# Altium PCB Layout.PcbDoc
Units mm, origin at the board's own origin, x right, y up, seen from the top; angles counter-clockwise.
Board outline 29.5 x 30 mm, 2 copper layers (Top Layer, Bottom Layer), stack 1.135 mm thick; 16 components, 13 nets, 63 pads, 8 vias.
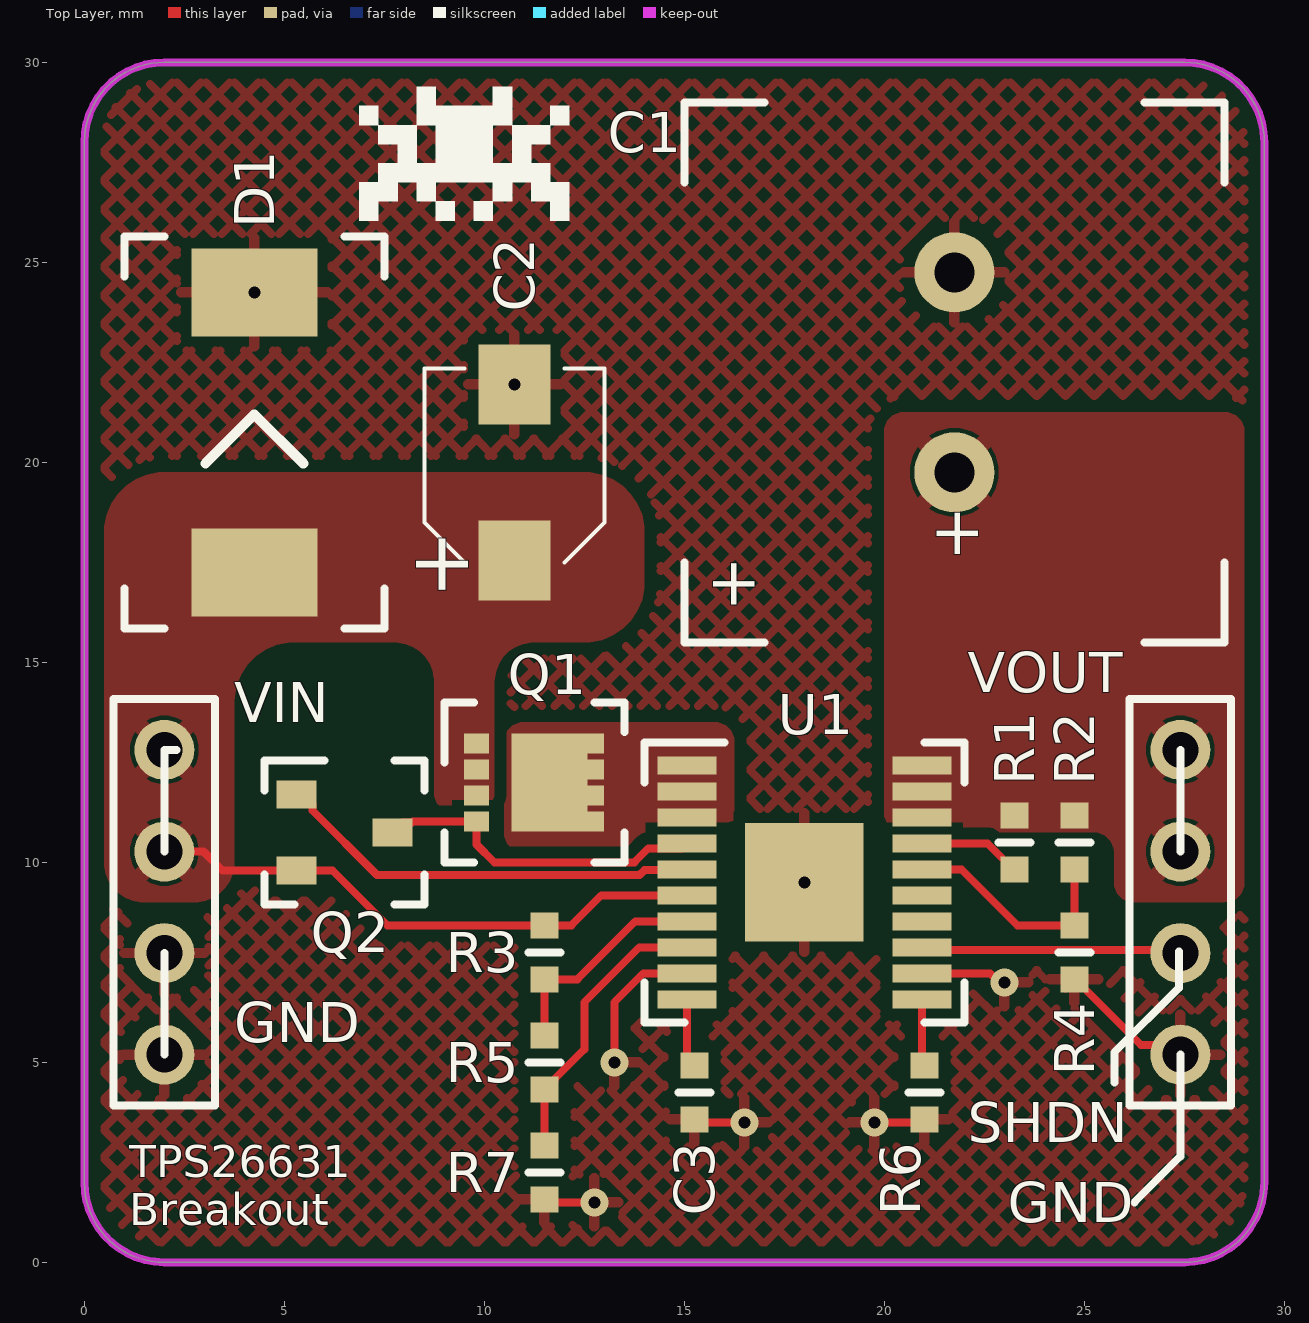
[diagram p0: Top Layer view]
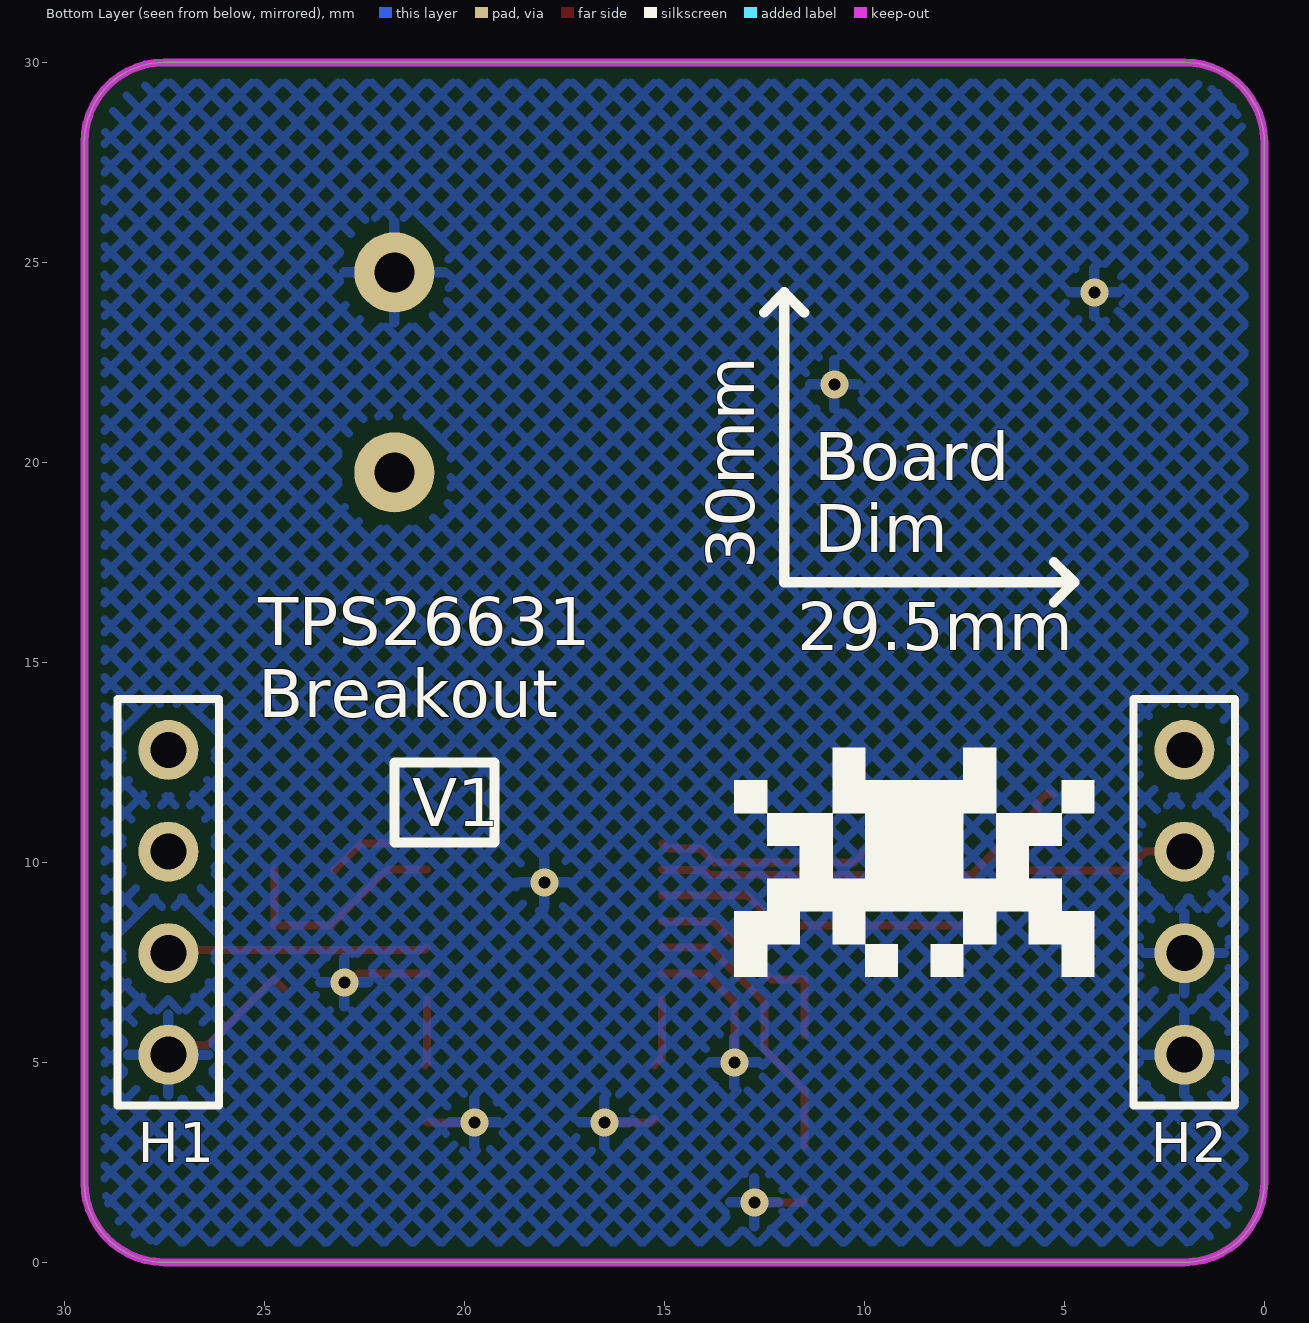
[diagram p1: Bottom Layer view, seen from below]
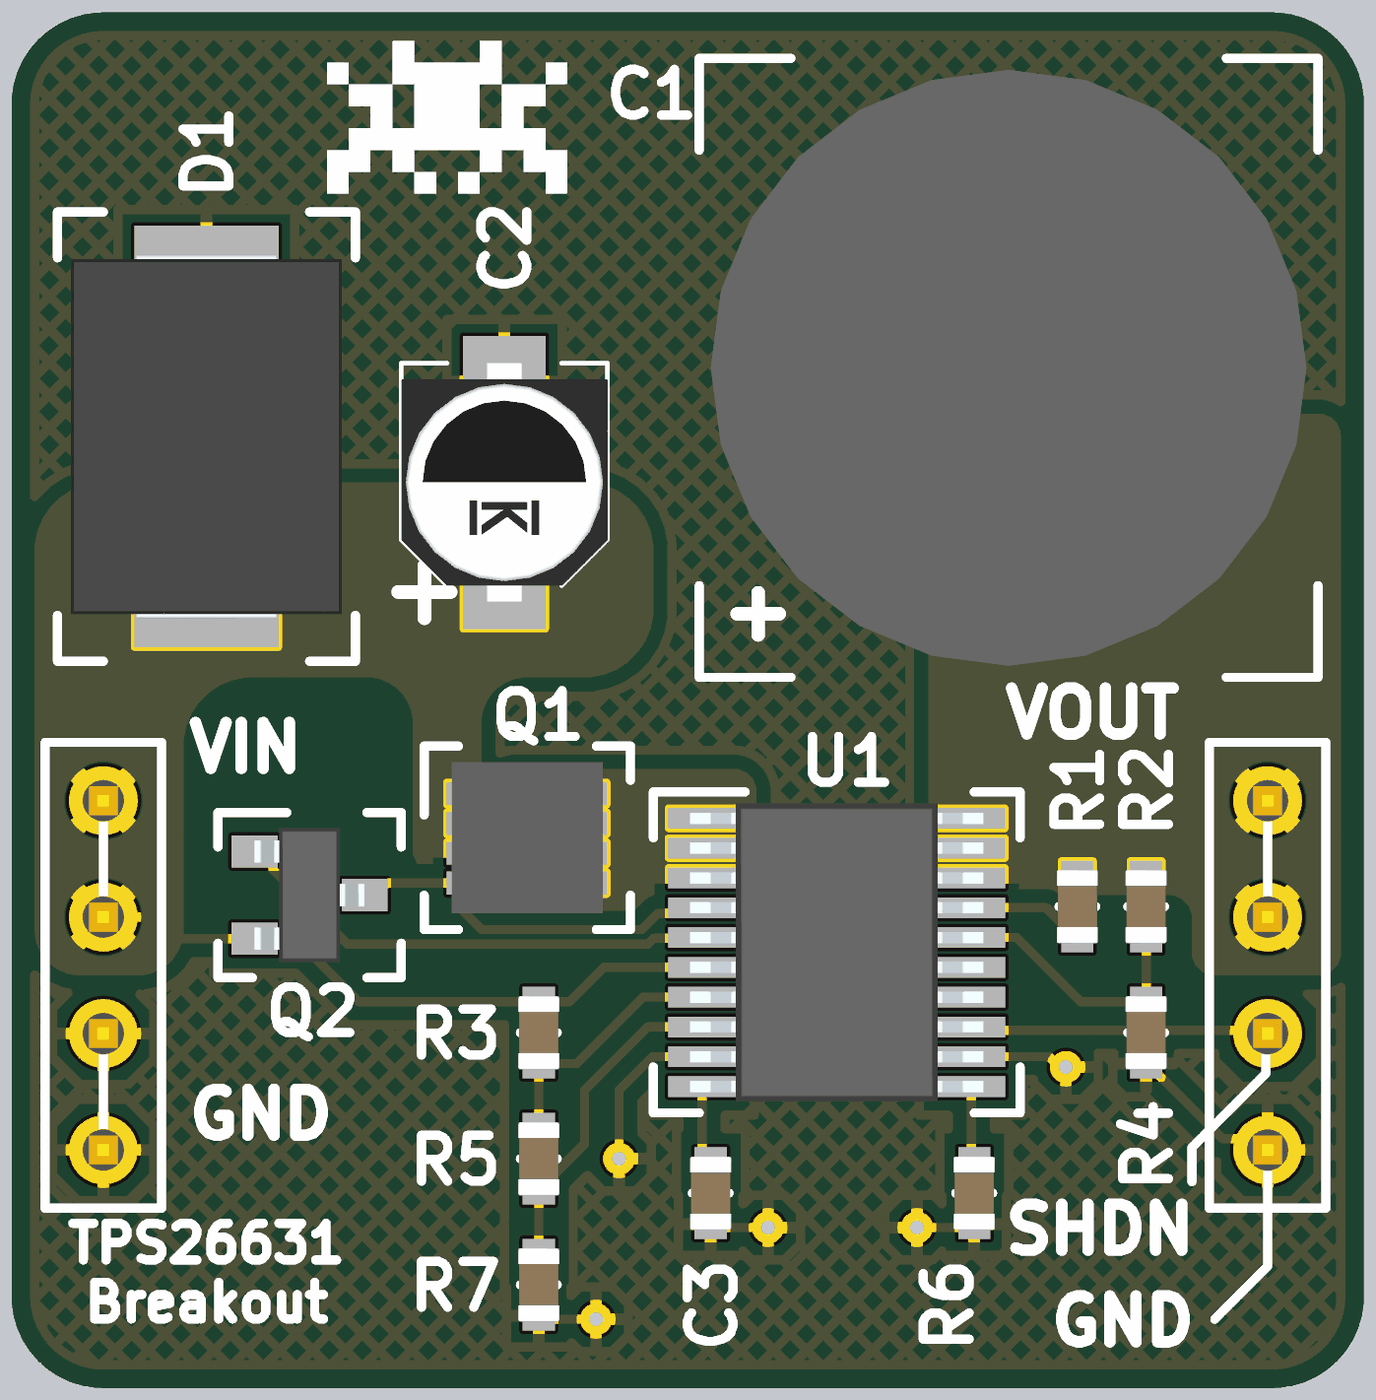
[diagram p2: 3D render of the assembled board from above, using the file's embedded part models]

## Layer stack, top to bottom
Top Solder: solder mask 0.0102, Solder Resist, Dk 3.8
Top Layer: signal copper 0.035
Dielectric 1: prepreg 1.065, FR-4, Dk 4.8
Bottom Layer: signal copper 0.035
Bottom Solder: solder mask 0.0102, Solder Resist, Dk 3.8

## Board outline
2,0 cw(c2,2) 0,2 0,28 cw(c2,28) 2,30 27.5,30 cw(c27.5,28) 29.5,28 29.5,2 cw(c27.5,2) 27.5,0

## Design rules (kind name [scope] priority, off if disabled: settings)
BoardOutlineClearance [All] p1: gap=0.2 ignorepadtopadclearanceinfootprint=FALSE
Clearance "inPolygon Clearance" [InPolygon] p1: gap=0.3 ignorepadtopadclearanceinfootprint=TRUE // this rule ensures that every net within a polygon of a different net has a set clearance from the poly
Clearance "High Current Polygon Clearance" [(InPolygon AND InNetClass('High_Current_Nets'))] p2: gap=0 ignorepadtopadclearanceinfootprint=TRUE // this rule ensures that every net within a polygon of a different net has a set clearance from the poly
Clearance "Different Diff Pair" [All] p3: gap=0.2 ignorepadtopadclearanceinfootprint=TRUE
Clearance "Same Diff Pair" [All] p4: gap=0.1 ignorepadtopadclearanceinfootprint=TRUE
Clearance "Different Nets" [not InAnyDifferentialPair] p5: gap=0.3 ignorepadtopadclearanceinfootprint=TRUE except(0.1: Arc-SMDPad Arc-THPad Arc-Via Arc-Text Track-SMDPad Track-THPad Track-Via Track-Text SMDPad-Text THPad-Text Via-Text Fill-Text Poly-Text Region-Text Text-Text; 0.12: Arc-Arc Arc-Track Track-Track; 0.15: SMDPad-SMDPad SMDPad-THPad SMDPad-Via THPad-THPad THPad-Via Via-Via; 0.2: Arc-Hole Track-Hole SMDPad-Hole THPad-Hole Via-Hole Fill-Hole Poly-Hole Region-Hole Text-Hole)
Clearance "Same Net" [not InAnyDifferentialPair] p6: gap=0 ignorepadtopadclearanceinfootprint=TRUE except(0.1: THPad-Via; 0.18: Arc-Arc Arc-Track Track-Track)
ComponentClearance [All] p1: gap=0.102 collisioncheckmode=3 verticalgap=0.102 showdistances=TRUE
DiffPairsRouting "Ethernet Routing" [InDifferentialPairClass('Ethernet_Pairs')] p1: maxlimit=0.2 minlimit=0.2 mostfreqgap=0.2 toplayer_minwidth=0.25 toplayer_maxwidth=0.25 toplayer_prefwidth=0.25 bottomlayer_minwidth=0.25 bottomlayer_maxwidth=0.25 bottomlayer_prefwidth=0.25 impedanceprofiledriven=TRUE maxuncoupledlength=12.7
DiffPairsRouting "USB Routing" [InDifferentialPairClass('USB_Pairs')] p2: maxlimit=0.127 minlimit=0.127 mostfreqgap=0.127 toplayer_minwidth=0.23 toplayer_maxwidth=0.23 toplayer_prefwidth=0.23 bottomlayer_minwidth=0.23 bottomlayer_maxwidth=0.23 bottomlayer_prefwidth=0.23 maxuncoupledlength=12.7
DiffPairsRouting "CAN Routing" [InDifferentialPairClass('CAN_Pairs')] p3: maxlimit=0.5 minlimit=0.5 mostfreqgap=0.5 toplayer_minwidth=0.201 toplayer_maxwidth=0.201 toplayer_prefwidth=0.201 bottomlayer_minwidth=0.201 bottomlayer_maxwidth=0.201 bottomlayer_prefwidth=0.201 impedanceprofiledriven=TRUE maxuncoupledlength=12.7
Height [All] p1: minheight=0 maxheight=1816.048 prefheight=12.7
HoleSize [All] p1: absolutevalues=TRUE maxlimit=6.3 minlimit=0.3 maxpercent=80.000 minpercent=20.000
HoleToHoleClearance [All] p1: gap=0.25 allowstackedmicrovias=FALSE
MatchedLengths "XTAL Nets Matched Delays" [InNetClass('XTAL_Nets')] p1: tolerance=25.4 checknetsindiffpair=FALSE checkdiffpairvsdiffpair=TRUE checkxsignals=TRUE checkothers=TRUE usedelayunits=TRUE delaytolerance=10.000000
MatchedLengths "Diff Pair Matched Delays" [InDifferentialPairClass('Ethernet_Pairs') or InDifferentialPairClass('USB_Pairs') or InDifferentialPairClass('CAN_Pairs')] p2: tolerance=5 checknetsindiffpair=TRUE checkdiffpairvsdiffpair=FALSE checkxsignals=FALSE checkothers=FALSE usedelayunits=TRUE delaytolerance=100.000000 phasematching=TRUE phasedelaytolerance=5.000000 phasedistance=12.7
MinimumAnnularRing [All] p1: minimumring=0.2
MinimumSolderMaskSliver [All] p1: minsoldermaskwidth=0
PlaneClearance "Supply Net Clearance" [InNetClass('Supply_Nets')] p1: clearance=0.5
PlaneClearance "All Nets" [All] p2: clearance=0.3
PolygonConnect "High Current" [InNetClass('High_Current_Nets')] p1: thpad.connectstyle=Relief thpad.reliefconductorwidth=0.4 thpad.reliefentries=4 thpad.polygonreliefangle="90 Angle" thpad.airgapwidth=0.1 thpad.conductorbypadedge=TRUE thpad.mindistance=0.381 thpad.enablemindistance=FALSE smdpad.connectstyle=Direct smdpad.reliefconductorwidth=0.254 smdpad.reliefentries=4 smdpad.polygonreliefangle="90 Angle" smdpad.airgapwidth=0.254 via.connectstyle=Direct via.reliefconductorwidth=0.254 via.reliefentries=4 via.polygonreliefangle="90 Angle" via.airgapwidth=0.254
PolygonConnect "Supply Nets" [InNetClass('Supply_Nets') OR InNetClass('Supply_Net')] p2: connectstyle=Relief reliefconductorwidth=0.3 reliefentries=4 polygonreliefangle="90 Angle" conductorbypadedge=TRUE mindistance=0.381 enablemindistance=FALSE airgapwidth=0.254
PolygonConnect General [All] p3: connectstyle=Relief reliefconductorwidth=0.254 reliefentries=4 polygonreliefangle="90 Angle" airgapwidth=0.254
RoutingVias [All] p1: holewidth=0.2 width=0.35 viastyle="Through Hole" minholewidth=0.15 minwidth=0.3 maxholewidth=6.3 maxwidth=6.55
SilkToSilkClearance [All] p1: silktosilkclearance=0
SilkToSolderMaskClearance [All] p1: minsilkscreentomaskgap=0 clearancetoexposedcopper=TRUE
SolderMaskExpansion [All] p1: expansion=0.075 istentingtop=FALSE
SupplyNets "Schematic Supply Nets_2" [InNet('VOUT')] p1: voltage=0.000
SupplyNets "Schematic Supply Nets_1" [InNet('VIN')] p2: voltage=0.000
SupplyNets "Schematic Supply Nets_3" [InNet('GND')] p3: voltage=0.000
UnRoutedNet [All] p1: checkbadconnections=TRUE
Width "nRF Width" [InNetClass('nRF Signal')] p1: maxlimit=0.379 minlimit=0.379 preferedwidth=0.379 minimp=50.000000 maximp=50.000000 favimp=50.000000 checkconnectedcopper=TRUE
Width [All] p2: maxlimit=100 minlimit=0.1 preferedwidth=0.2
20 further rules are at their usual default settings.

## Classes and differential pairs
net class High_Current_Nets: NetQ1_3 VIN VOUT

## Components (designator, comment, footprint, x,y, rotation, side; value= is the part's Value field where it differs from the comment)
C1 "[Cap] Thru-Hole 1000uF 20% 35V" "[Cap] Thru-Hole Polarized 10mm" 21.75,22.25 r90 top (schematic designator C2)
C2 "[Cap] 4mm 1uF 20% 100V" "[Cap] SMD Polarized, 4mm" 10.75,19.75 r90 top (schematic designator C1)
C3 "[Cap] 0603 0.1uF 10% 50V" "[Cap] SMD 0603" 15.25,4.25 r90 top
D1 "DO-214AB" "[Diode] SMD DO-214AB" 4.25,20.75 r90 top
H1 "1x4 Header" "[Header] 1x4 Male" 27.4,9 r270 bottom (schematic designator H2)
H2 "1x4 Header" "[Header] 1x4 Male" 2,9 r270 bottom (schematic designator H1)
Q1 "CSD19537Q3" 8-VSON-CLIP 11.25,12 r270 top
Q2 "[NMOS] SMD 50V 220mA 3Ohm" SOT-23 6.5,10.75 r0 top
R1 "[24k] SMD 0603 1% 1/10W" "[Res] SMD 0603" 23.25,10.5 r90 top (schematic designator R2)
R2 "[499k] SMD 0603 1% 1/8W" "[Res] SMD 0603" 24.75,10.5 r90 top (schematic designator R1)
R3 "[681k] SMD 0603 1% 1/10W" "[Res] SMD 0603" 11.5,7.75 r90 top (schematic designator R4)
R4 "[56k] SMD 0603 1% 1/10W" "[Res] SMD 0603" 24.75,7.75 r90 top (schematic designator R3)
R5 "[8.25k] SMD 0603 1% 1/10W" "[Res] SMD 0603" 11.5,5 r90 top
R6 "[35.7k] SMD 0603 0.1% 1/10W" "[Res] SMD 0603" 21,4.25 r90 top
R7 "[34k] SMD 0603 1% 1/10W" "[Res] SMD 0603" 11.5,2.25 r90 top
U1 "TPS26631PWPT" "[E-Fuse] 4.5-60V 6A" 18,9.5 r0 top

## Footprints (in the part's own frame and the unit in brackets; to place one, negate y for a bottom-side part, rotate by r counter-clockwise, add the part's x,y. Pads: shape width x height; smd on the part's side, far side on the other; paste and mask are expansions set on the pad)
8-VSON-CLIP [mm]
  rect 0.5x0.63 smd: 1(0.985,-1.445) 2(-0.965,-1.445) 2(-0.315,-1.445) 2(0.335,-1.445)
  rect 0.5x0.41 smd: 3(-0.965,1.535) 3(-0.315,1.535) 3(0.335,1.535) 3(0.985,1.535)
  rect 2.45x1.9 smd: 3(0.01,0.38)
  silkscreen extent -2,-2.25 2,2.25, body extent -1.65,-1.65 1.65,1.65, height 1.1
"[Cap] SMD 0603" [mm]
  rect 0.65x0.7 smd: 1(-0.675,0) 2(0.675,0)
  silkscreen extent 0,-0.4 0,0.4, body extent -0.8,-0.45 0.8,0.45, height 0.8
"[Cap] SMD Polarized, 4mm" [mm]
  rect 2x1.8 smd: 1(-2.2,0) 2(2.2,0)
  silkscreen extent -2.25,-2.25 2.6,2.25, body extent -2.6,-2.25 2.6,2.25, height 5.66
"[Cap] Thru-Hole Polarized 10mm" [mm]
  round 2 hole 1: 1(-2.5,0) 2(2.5,0)
  silkscreen extent -6.75,-6.75 6.75,6.75, body extent -6.5,-6.49 6.5,6.49, height 26.5
"[Diode] SMD DO-214AB" [mm]
  rect 2.2x3.15 smd: 1(-3.5,0) 2(3.5,0)
  silkscreen extent -4.9,-3.25 4.9,3.25, body extent -3.97,-2.95 3.97,2.95, height 2.62
"[E-Fuse] 4.5-60V 6A" [mm] "TPS26631PWPT"
  rect 1.475x0.45 smd: 1(-2.938,2.925) 2(-2.938,2.275) 3(-2.938,1.625) 4(-2.938,0.975) 5(-2.938,0.325) 6(-2.938,-0.325) 7(-2.938,-0.975) 8(-2.938,-1.625) 9(-2.938,-2.275) 10(-2.938,-2.925) 11(2.938,-2.925) 12(2.938,-2.275) 13(2.938,-1.625) 14(2.938,-0.975) 15(2.938,-0.325) 16(2.938,0.325) 17(2.938,0.975) 18(2.938,1.625) 19(2.938,2.275) 20(2.938,2.925)
  rect 2.96x2.96 smd: 21(0,0)
  silkscreen extent -4,-3.5 4,3.5, body extent -3.2,-3.25 3.2,3.25, height 1.2
"[Header] 1x4 Male" [mm] "2.54mm pitch"
  round 1.5 hole 0.9: 1(-3.81,0) 2(-1.27,0) 3(1.27,0) 4(3.81,0)
  silkscreen extent -5.08,-1.27 5.08,1.27, body extent -5.08,-1.27 5.08,1.27, height 9.5
"[Res] SMD 0603" [mm]
  rect 0.65x0.7 smd: 1(-0.675,0) 2(0.675,0)
  silkscreen extent 0,-0.4 0,0.4, body extent -0.8,-0.45 0.8,0.45, height 0.8
SOT-23 [mm]
  rect 1x0.7 smd: 1(-1.2,0.95) 2(-1.2,-0.95) 3(1.2,0)
  silkscreen extent -2,-1.8 2,1.8, body extent -1.2,-1.46 1.2,1.46, height 1.2

## Part data
C1: "35PK1000MEFC10X20", Capacitance=1000uF, Max Voltage=35V, Size Package=Thru-Hole, Supplier Part Number 1=1189-1742-ND, Tolerance=20%, Supplier 1=DigiKey
C2: "865080840001", Capacitance=1uF, Max Voltage=100V, Size Package=4mm, Supplier Part Number 1=732-865080840001CT-ND, Tolerance=20%, Supplier 1=DigiKey
C3: "CL10B104KB8NNNC", Capacitance=100nF, Max Voltage=50V, Size Package=0603, Supplier Part Number 1=1276-1000-6-ND, Tolerance=10%, Supplier 1=DigiKey
D1: library part "[TVS] 36Vnom 40Vclamp_max", "SMCJ36CA", Optimal Zener Voltage=36V, Supplier Part Number 1=SMCJ36CALFDKR-ND, Supplier 1=DigiKey, Wattage=1.5kW
H1 H2: library part "[Header] 1x4 Male", "2.54mm pitch"
Q1: library part "[NMOS] SMD 100V 50A 14.5mOhm", Package=8-VSON-CLIP, Supplier Part Number 1=296-44351-6-ND, IDS_Max=50A, Supplier 1=DigiKey, VDS_Max=100V
Q2: "BSS138", Package=SOT-23, Supplier Part Number 1=BSS138DKR-ND, IDS_Max=220mA, Supplier 1=DigiKey, VDS_Max=50V
R1: "RC0603FR-1324KL", Resistance=24k, Size Package=0603, Supplier Part Number 1=13-RC0603FR-1324KLCT-ND, Tolerance=1%, Supplier 1=DigiKey, Wattage=1/10W
R2: "CRCW0603499KFKEA", Resistance=499k, Size Package=0603, Supplier Part Number 1=541-499KHDKR-ND, Tolerance=1%, Supplier 1=DigiKey, Wattage=1/8W
R3: "RT0603FRE07681KL", Resistance=681k, Size Package=0603, Supplier Part Number 1=13-RT0603FRE07681KLCT-ND, Tolerance=1%, Supplier 1=DigiKey, Wattage=1/10W
R4: "CRGCQ0603F56K", Resistance=56k, Size Package=0603, Supplier Part Number 1=A129709CT-ND, Tolerance=1%, Supplier 1=DigiKey, Wattage=1/10W
R5: "AF0603FR-078K25L", Resistance=8.25k, Size Package=0603, Supplier Part Number 1=13-AF0603FR-078K25LCT-ND, Tolerance=1%, Supplier 1=DigiKey, Wattage=1/10W
R6: "RT0603BRE0735K7L", Resistance=35.7k, Size Package=0603, Supplier Part Number 1=YAG4707CT-ND, Tolerance=0.1%, Supplier 1=DigiKey, Wattage=1/10W
R7: "RC0603FR-1334KL", Resistance=34k, Size Package=0603, Supplier Part Number 1=13-RC0603FR-1334KLDKR-ND, Tolerance=1%, Supplier 1=DigiKey, Wattage=1/10W
U1: library part "[E-Fuse] 4.5-60V 6A"

## Via types
v1: diameter 0.7, hole 0.3, Top Layer to Bottom Layer, 8 vias

## Nets (pads, with @x,y where several pads share a name; then routed paths per layer and width w, separated by ;. In a path a pad name is that pad's centre, name@x,y a point inside that pad or via, vN(x,y) a via of type N, cw(c..) or ccw(c..) an arc to the next point about the centre after c; other vN are vias at no path point)
\EFuse_SHDN: H1.3 U1.13 | length 6.5
  Top Layer w0.2: U1.13 21.01,7.802 27.328,7.802 H1.3
EFuse_OVP: R5.1 R7.2 U1.8 | length 7.1
  Top Layer w0.2: R7.2 R5.1 11.525,4.325 11.75,4.55 11.75,4.575 12.5,5.325 12.5,6.5 13.875,7.875 U1.8
EFuse_PGOOD: R1.1 U1.17 | length 2.6
  Top Layer w0.2: U1.17 22.575,10.475 23.225,9.825 R1.1
EFuse_UVLO: R3.1 R5.2 U1.7 | length 5.6
  Top Layer w0.2: R5.2 R3.1 12.325,7.075 13.775,8.525 U1.7
GND: C1.2 C2.2 C3.1 D1.2 H1.4 H2.3 H2.4 R4.1 R6.1 R7.1 U1.9 U1.12 U1.21 | length 13.2
  Top Layer w0.2: R7.1 11.575,1.5 v1(12.75,1.5) ; v1(13.25,5) 13.25,6.5 13.975,7.225 U1.9 ; C3.1 15.325,3.5 v1(16.5,3.5) ; v1(19.75,3.5) R6.1@20.925,3.5 ; U1.12 22.64,7.225 22.865,7 v1(23,7) ; R4.1@24.525,6.85 R4.1 ; R4.1@24.775,7.075 26.411,5.439 27.151,5.439 H1.4
  other v1: 18,9.5 10.75,21.95 4.25,24.25
NetC3_2: C3.2 U1.10 | length 1.7
  Top Layer w0.2: U1.10 15.062,5.113 C3.2
NetQ1_1: Q1.1 Q2.3 U1.4 | length 8.4
  Top Layer w0.2: Q2.3 7.95,11 8.196,11 8.211,11.015 Q1.1 9.805,10.445 10.25,10 13.75,10 14.1,10.35 14.937,10.35 U1.4
NetQ1_3: Q1.3 U1.1 U1.2 U1.3
NetQ2_1: Q2.1 U1.5 | length 10.7
  Top Layer w0.2: Q2.1 5.45,11.7 5.7,11.45 5.7,11.3 7.32,9.68 13.883,9.68 14.01,9.807 15.044,9.807 U1.5
NetR2_1: R2.1 R4.2 U1.16 | length 5.8
  Top Layer w0.2: U1.16 21.925,9.825 23.325,8.425 R4.2 R2.1
NetR6_2: R6.2 U1.11 | length 1.7
  Top Layer w0.2: U1.11 20.938,4.987 R6.2
VIN: C2.1 D1.1 H2.1 H2.2 Q1.2 Q2.2 R3.2 U1.6 | length 14.1
  Top Layer w0.2: H2.2 2.98,10.27 3.45,9.8 Q2.2 6.2,9.8 7.575,8.425 R3.2 12.175,8.425 12.925,9.175 U1.6
VOUT: C1.1 H1.1 H1.2 R1.2 R2.2 U1.18 U1.19 U1.20
pads on no net: U1.14 U1.15

## Polygon pours and split planes (outlines as drawn)
GND on Top Layer "Top GND Poly" (hatched 45Degree grid 0.508 track 0.203, remove dead copper, pour order 5): 0,0 29.5,0 29.5,30 0,30
VOUT on Top Layer "meow" (solid, remove dead copper, pour order 4): 20.5,21.25 28.5,21.25 cw(c28.5,20.75) 29,20.75 29,9.5 cw(c28.5,9.5) 28.5,9 26.25,9 cw(c26.25,9.5) 25.75,9.5 25.75,10.25 ccw(c25.25,10.25) 25.25,10.75 20.5,10.75 cw(c20.5,11.25) 20,11.25 20,20.75 cw(c20.5,20.75)
NetQ1_3 on Top Layer "meow" (solid, remove dead copper, pour order 1): 11,13.5 15.75,13.5 cw(c15.75,13) 16.25,13 16.25,11.2 cw(c15.8,11.2) 15.8,10.75 14,10.75 13.5,10.25 11,10.25 cw(c11,10.75) 10.5,10.75 10.5,13 cw(c11,13)
VIN on Top Layer "Top VIN" (solid, remove dead copper, pour order 0): 2,19.75 ccw(c2,18.25) 0.5,18.25 0.5,10 ccw(c1.5,10) 1.5,9 2.75,9 ccw(c2.75,10) 3.75,10 3.75,14 cw(c5.25,14) 5.25,15.5 7.75,15.5 cw(c7.75,14.5) 8.75,14.5 8.75,11.75 ccw(c9.25,11.75) 9.25,11.25 9.75,11.25 ccw(c9.75,11.75) 10.25,11.75 10.25,14.5 cw(c11.25,14.5) 11.25,15.5 12.5,15.5 ccw(c12.5,17) 14,17 14,18.25 ccw(c12.5,18.25) 12.5,19.75
GND on Bottom Layer "Bottom GND Poly" (hatched 45Degree grid 0.508 track 0.203, remove dead copper, pour order 6): 0,0 29.5,0 29.5,30 0,30

## Keep-outs
Keep-Out Layer:
  the board outline again, w0.2

## Silkscreen, mask and mechanical layers (free items; w line width, h text height)
Top Overlay:
  region: 8.962,26.045 8.784,26.045 8.784,26.523 9.261,26.523 9.261,26.522 9.261,26.045 8.963,26.045
  region: 6.875,28.775 6.875,28.909 7.352,28.909 7.352,28.908 7.352,28.432 6.875,28.432 6.875,28.775
  region: 11.648,28.579 11.648,28.908 11.648,28.909 12.125,28.909 12.125,28.432 11.648,28.432 11.648,28.578
  region: 10.216,26.485 10.216,26.045 9.739,26.045 9.739,26.522 9.739,26.523 10.216,26.523 10.216,26.485
  region: 8.315,29.386 8.784,29.386 8.784,28.909 10.216,28.909 10.216,29.386 10.693,29.386 10.693,28.432 10.216,28.432 10.216,27.477 10.693,27.477 10.693,28.432 11.648,28.432 11.648,27.955 11.647,27.955 11.17,27.955 11.17,27.477 11.647,27.477 11.648,27.477 11.648,27 12.125,27 12.125,26.045 11.648,26.045 11.648,26.523 11.171,26.523 11.17,26.523 11.17,27 10.693,27 10.693,26.523 10.216,26.523 10.216,27 8.784,27 8.784,26.523 8.307,26.523 8.307,27 7.83,27 7.83,26.523 7.829,26.523 7.352,26.523 7.352,26.045 6.875,26.045 6.875,27 7.352,27 7.352,27.477 7.353,27.477 7.83,27.477 7.83,27.955 7.353,27.955 7.352,27.955 7.352,28.432 8.307,28.432 8.307,27.477 8.784,27.477 8.784,28.432 8.307,28.432 8.307,29.386 8.315,29.386
  lines w0.2: 2,5.19 2,7.73 ; 2,10.5 2,10.27 2,12.81 2.31,12.81 ; 25.75,4.5 25.75,5.25 27.364,6.864 27.364,7.766 ; 26.25,1.5 27.4,2.65 27.4,5.19 ; 27.4,10.27 27.4,12.81
  text "VOUT" at 22.085,14.25 h1
  text "VIN" at 3.75,13.5 h1
  text "GND" at 3.75,5.5 h1
  text "SHDN" at 22.085,3 h1
  text "GND" at 23.084,1 h1
  text "TPS26631 / Breakout" at 1.118,0.93 h0.8
Bottom Overlay:
  region: 4.627,12.046 5.068,12.046 5.068,11.228 4.25,11.228 4.25,12.046 4.624,12.046
  region: 12.687,12.046 13.25,12.046 13.25,11.228 12.432,11.228 12.432,12.046 12.685,12.046
  region: 9.164,7.955 9.977,7.955 9.977,7.137 9.159,7.137 9.159,7.955 9.162,7.955
  region: 7.523,7.427 7.523,7.955 8.341,7.955 8.341,7.137 7.523,7.137 7.523,7.424
  region: 6.705,12.539 6.705,12.864 7.523,12.864 7.523,12.046 9.977,12.046 9.977,12.864 10.795,12.864 10.795,11.228 9.977,11.228 9.977,9.591 10.795,9.591 10.795,11.228 12.432,11.228 12.432,10.409 11.614,10.409 11.614,9.591 12.432,9.591 12.432,8.773 13.25,8.773 13.25,7.137 12.432,7.137 12.432,7.955 11.614,7.955 11.614,8.773 10.795,8.773 10.795,7.955 9.977,7.955 9.977,8.773 7.523,8.773 7.523,7.955 6.705,7.955 6.705,8.773 5.886,8.773 5.886,7.955 5.068,7.955 5.068,7.137 4.25,7.137 4.25,8.773 5.068,8.773 5.068,9.591 5.886,9.591 5.886,10.409 5.068,10.409 5.068,11.228 6.705,11.228 6.705,9.591 7.523,9.591 7.523,11.228 6.705,11.228 6.705,12.537
  lines w0.25: 19.25,10.5 21.75,10.5 21.75,12.5 19.25,12.5 19.25,10.5
  lines w0.254: 4.75,17.008 5.258,16.5 ; 5.258,17.508 4.75,17 12,17 12,24.25 12.508,23.742 ; 11.5,23.742 12.008,24.25
  text "Board" at 11.25,19.55 h1.2
  text "Dim" at 11.25,17.75 h1.2
  text "30mm" at 12.75,17.326 h1.2 r270
  text "29.5mm" at 11.674,15.3 h1.2
  text "TPS26631 / Breakout" at 25.149,13.63 h1.2
  text "V1" at 21.3,10.9 h1.2
Poly Planning:
  lines w0.1: 0.5,10 ccw(c1.5,10) 1.5,9 ; 0.5,18.25 cw(c2,18.25) 2,19.75 ; 2.75,9 ccw(c2.75,10) 3.75,10 ; 3.75,14 cw(c5.25,14) 5.25,15.5 ; 7.75,15.5 cw(c7.75,14.5) 8.75,14.5 ; 8.75,11.75 ccw(c9.25,11.75) 9.25,11.25 ; 9.75,11.25 ccw(c9.75,11.75) 10.25,11.75 ; 10.25,14.5 cw(c11.25,14.5) 11.25,15.5 ; 10.5,10.75 ccw(c11,10.75) 11,10.25 ; 10.5,13 cw(c11,13) 11,13.5 ; 12.5,15.5 ccw(c12.5,17) 14,17 ; 12.5,19.75 cw(c12.5,18.25) 14,18.25 ; 15.75,10.75 ccw(c15.75,11.25) 16.25,11.25 ; 15.75,13.5 cw(c15.75,13) 16.25,13 ; 20,11.25 ccw(c20.5,11.25) 20.5,10.75 ; 20,20.75 cw(c20.5,20.75) 20.5,21.25 ; 25.25,10.75 cw(c25.25,10.25) 25.75,10.25 ; 25.75,9.5 ccw(c26.25,9.5) 26.25,9 ; 28.5,9 ccw(c28.5,9.5) 29,9.5 ; 28.5,21.25 cw(c28.5,20.75) 29,20.75 ; 0.5,9 0.5,19.75 14,19.75 14,15.5 10.25,15.5 10.25,11.25 8.75,11.25 8.75,15.5 3.75,15.5 3.75,9 0.5,9 ; 10.5,10.25 13.5,10.25 14,10.75 16.25,10.75 16.25,13.5 10.5,13.5 10.5,10.25 ; 20,10.75 25.75,10.75 25.75,9 29,9 29,21.25 20,21.25 20,10.75

## Text inside footprints (layer, text, board x,y; h text height)
C1: Top Overlay "+" at 16.762,16.262 h1.2 r90; Top Overlay "+" at 22.35,17.532 h1.2 r90
C2: Top Overlay "+" at 9.595,16.583 h1.5 r90